# Altium PCB SY8029AIC-PCB.PcbDoc
Units mil, origin at the board's own origin, x right, y up, seen from the top; angles counter-clockwise.
Board outline not stored, 4 copper layers (Top Layer, Internal Plane 1, Mid-Layer 1, Bottom Layer), stack 18.2 mil thick; 14 components, 0 nets, 32 pads, 9 vias.
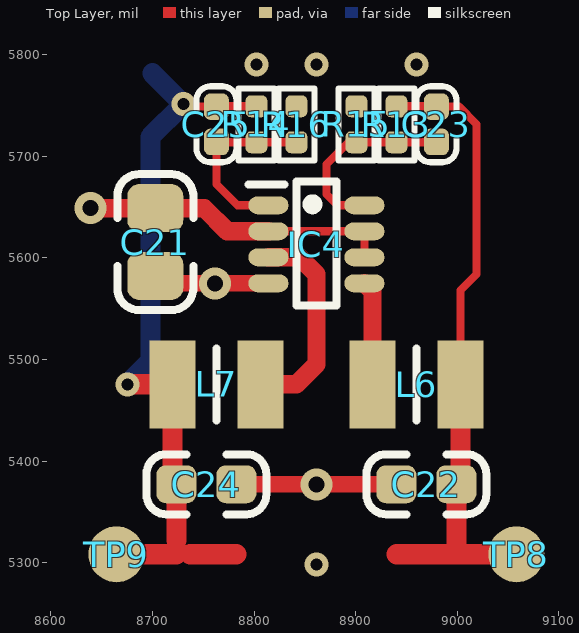
[diagram p0: Top Layer view]
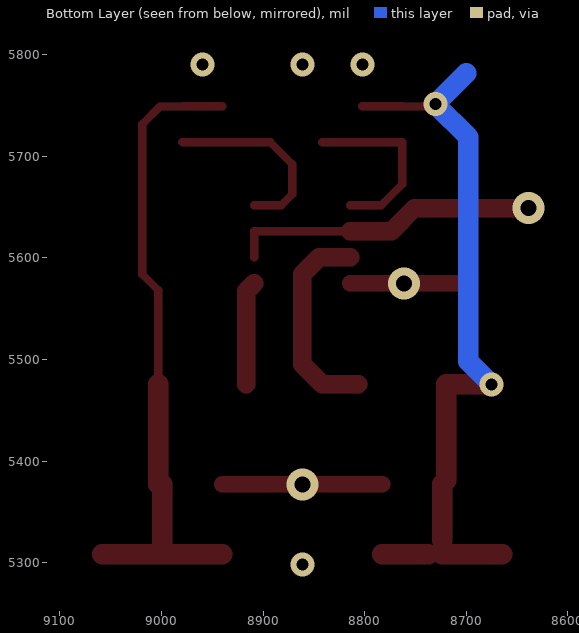
[diagram p1: Bottom Layer view, seen from below]
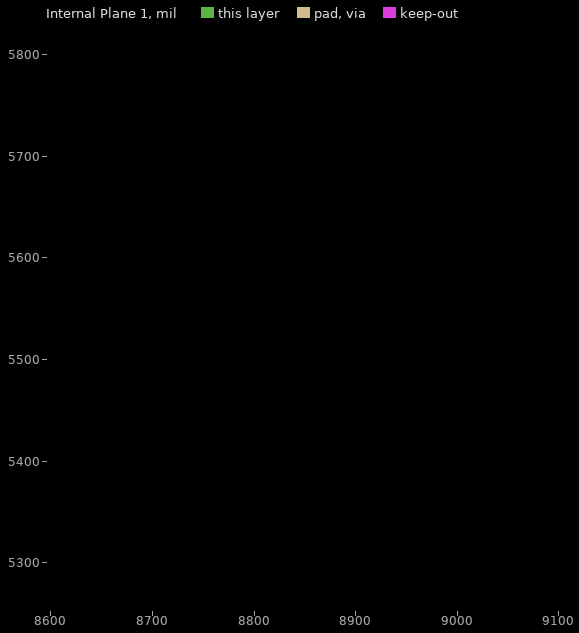
[diagram p2: Internal Plane 1, clearances drawn from the general rule]

## Layer stack, top to bottom
Top Solder: solder mask 0.4, Solder Resist, Dk 3.5
Top Layer: signal copper 1.4
Dielectric 1: dielectric 12.6, FR-4, Dk 4.8
Internal Plane 1: plane copper 1.4
Mid-Layer 1: signal copper 1.4
Bottom Layer: signal copper 1.4
Bottom Solder: solder mask 0.4, Solder Resist, Dk 3.5

## Components (designator, comment, footprint, x,y, rotation, side; value= is the part's Value field where it differs from the comment)
C21 "10uF" C_0805 8702.82,5615.51 r270 top
C22 "22uF" C_0603 8969.69,5377.17 r180 top
C23 "22pF" C_0402 8979.53,5731.5 r270 top
C24 "22uF" C_0603 8753.15,5377.17 r0 top
C25 "22pF" C_0402 8762.99,5731.5 r90 top
IC4 "SY8029AIC" SOT23-8 8861.42,5613.39 r0 top
L6 "MLP2520H2R2ST0S1" INDC2520X100N 8959.84,5475.59 r0 top
L7 "MLP2520H2R2ST0S1" INDC2520X100N 8762.99,5475.59 r0 top
R13 "11kΩ" R_0402 8940.16,5731.5 r90 top
R14 "100kΩ" R_0402 8802.36,5731.5 r270 top
R15 "10kΩ" R_0402 8900.79,5731.5 r270 top
R16 "22kΩ" R_0402 8841.73,5731.5 r90 top
TP8 "TP" TP1.4mm 9058.27,5308.27 r90 top
TP9 "TP" TP1.4mm 8664.57,5308.27 r90 top

## Footprints (in the part's own frame and the unit in brackets; to place one, negate y for a bottom-side part, rotate by r counter-clockwise, add the part's x,y. Pads: shape width x height; smd on the part's side, far side on the other; paste and mask are expansions set on the pad)
C_0402 [mm] "Chip Capacitor, 2-Leads, Body 1.00x0.50mm, IPC Medium Density"
  rrect50% 0.66x0.62 smd: 1(-0.44,0) 2(0.44,0)
  silkscreen extent -0.95,-0.5 0.95,0.5, body extent -0.52,-0.27 0.53,0.28, height 0.55
C_0603 [mm] "Chip Capacitor, 2-Leads, Body 1.60x0.80mm, IPC Medium Density"
  rrect50% 1x0.95 smd: 1(-0.75,0) 2(0.75,0)
  silkscreen extent -1.5,-0.75 1.5,0.75, body extent -0.8,-0.4 0.8,0.4, height 0.87
C_0805 [mm] "Chip Capacitor, 2-Leads, Body 2.00x1.25mm, IPC Medium Density"
  rrect50% 1.2x1.4 smd: 1(-0.85,0) 2(0.85,0)
  silkscreen extent -1.7,-0.95 1.7,0.95, body extent -1,-0.62 1,0.63, height 0.88
INDC2520X100N [mm]
  rect 1.15x2.2 smd: 1(-1.1,0) 2(1.1,0)
  silkscreen extent 0,-0.9 0,0.9, body extent -1.25,-1 1.25,1, height 1
R_0402 [mm] "Chip Resistor, 2-Leads, Body 1.00x0.50mm, IPC Medium Density"
  rrect50% 0.55x0.55 smd: 1(-0.45,0) 2(0.45,0)
  silkscreen extent -0.9,-0.45 0.9,0.45, body extent -0.5,-0.27 0.5,0.28, height 0.4
SOT23-8 [mm]
  oval 1x0.45 smd: 1(-1.2,0.975) 2(-1.2,0.325) 3(-1.2,-0.325) 4(-1.2,-0.975) 5(1.2,-0.975) 6(1.2,-0.325) 7(1.2,0.325) 8(1.2,0.975)
  silkscreen extent -1.7,-1.52 0.5,1.58, body extent -1.4,-1.51 1.4,1.49, height 1.15
TP1.4mm [mm]
  round 1.4 smd: 1(0,0)

## Part data
C21 C22 C23 C24 C25: library part Cap_Chip, "贴片电容", Manufacturer_Name=SAMSUNG(三星), Manufacturer_Name_1=YAGEO(国巨), Manufacturer_Part_Number="±10% /25V", Manufacturer_Part_Number_1="±10% /25V"
IC4: "DC-DC降压芯片", Manufacturer_Name="Silergy Corp", Datasheet Link=https://datasheet.lcsc.com/szlcsc/Silergy-Corp-SY8029AIC_C207636.pdf, Manufacturer_Part_Number=SY8029AIC
L6 L7: library part MLP2520K1R0MT0S1, "Inductor", Manufacturer_Name=TDK, Manufacturer_Name_1=muRata(村田), Manufacturer_Part_Number_1=1239AS-H-2R2M=P2, Manufacturer_Part_Number=MLP2520K1R0MT0S1
R13 R14 R15 R16: library part Res_Chip, "贴片电阻", Manufacturer_Name=UNI-ROYAL(厚声), Manufacturer_Name_1=YAGEO(国巨), Manufacturer_Part_Number=±1%, Manufacturer_Part_Number_1=±1%
TP8 TP9: "测试点"

## Via types
v1: diameter 23.62, hole 11.81, Top Layer to Bottom Layer, tented both sides, 6 vias
v2: diameter 31.5, hole 15.75, Top Layer to Bottom Layer, tented both sides, 3 vias

## Nets (pads, with @x,y where several pads share a name; then routed paths per layer and width w, separated by ;. In a path a pad name is that pad's centre, name@x,y a point inside that pad or via, vN(x,y) a via of type N, cw(c..) or ccw(c..) an arc to the next point about the centre after c; other vN are vias at no path point)
pads on no net: C21.1 C21.2 C22.1 C22.2 C23.1 C23.2 C24.1 C24.2 C25.1 C25.2 IC4.1 IC4.2 IC4.3 IC4.4 IC4.5 IC4.6 IC4.7 IC4.8 L6.1 L6.2 L7.1 L7.2 R13.1 R13.2 R14.1 R14.2 R15.1 R15.2 R16.1 R16.2 TP8.1 TP9.1
copper on no net: | length 2602.6
  Top Layer w8: v1(8730.38,5751.33) 8732.89,5748.82 8743.31,5748.82 8762.99,5748.82 8763.39,5749.21 8802.36,5749.21 ; 8814.17,5626.18 8908.66,5626.18 8908.66,5600.59 ; 8814.17,5651.77 8783.66,5651.77 8762.99,5672.44 8762.99,5714.17 8763.39,5713.78 8802.36,5713.78 8841.73,5713.78 ; 8908.66,5651.77 8882.09,5651.77 8871.26,5662.6 8871.26,5692.13 8892.91,5713.78 8900.79,5713.78 8940.16,5713.78 8979.13,5713.78 8979.53,5714.17 ; 8940.16,5749.21 8979.13,5749.21 8979.53,5748.82 9001.57,5748.82 9018.9,5731.5 9018.9,5583.86 9003.15,5568.11 9003.15,5475.59
  Top Layer w16: 8708.86,5575 v2(8761.52,5575) 8814.17,5575 ; 8782.68,5377.17 v2(8861.42,5377.17) 8940.16,5377.17
  Top Layer w18: v2(8638.82,5648.97) 8702.82,5648.97 8750.88,5648.97 8773.67,5626.18 8814.17,5626.18 ; 8806.3,5475.59 8841.73,5475.59 8861.42,5495.28 8861.42,5583.86 8844.68,5600.59 8814.17,5600.59 ; 8908.66,5575 8916.54,5567.13 8916.54,5475.59
  Top Layer w20: 8664.57,5308.27 8723.62,5308.27 ; v1(8675.26,5475.59) 8719.69,5475.59 8719.69,5381.1 8723.62,5377.17 8723.62,5321.78 ; 8737.14,5308.27 8782.68,5308.27 ; 8940.16,5308.27 8999.21,5308.27 ; 9003.15,5475.59 9003.15,5377.17 8999.21,5377.17 8999.21,5308.27 ; 9058.27,5308.27 8999.21,5308.27
  Bottom Layer w20: v1(8675.26,5475.59) 8698.03,5498.36 8698.03,5718.98 v1(8730.38,5751.33) 8700.02,5781.69
  other v1: 8861.42,5298.43 8802.36,5790.55 8861.42,5790.55 8959.84,5790.55